# Altium PCB waku-ctl.PcbDoc (part 5 of 5)
Units mil, origin at the board's own origin, x right, y up, seen from the top; angles counter-clockwise.
Board outline 3530 x 2610 mil, 2 copper layers (Top Layer, Bottom Layer); 84 components, 84 nets, 358 pads, 106 vias.
Unrouted connection lines stored in the file: 42.
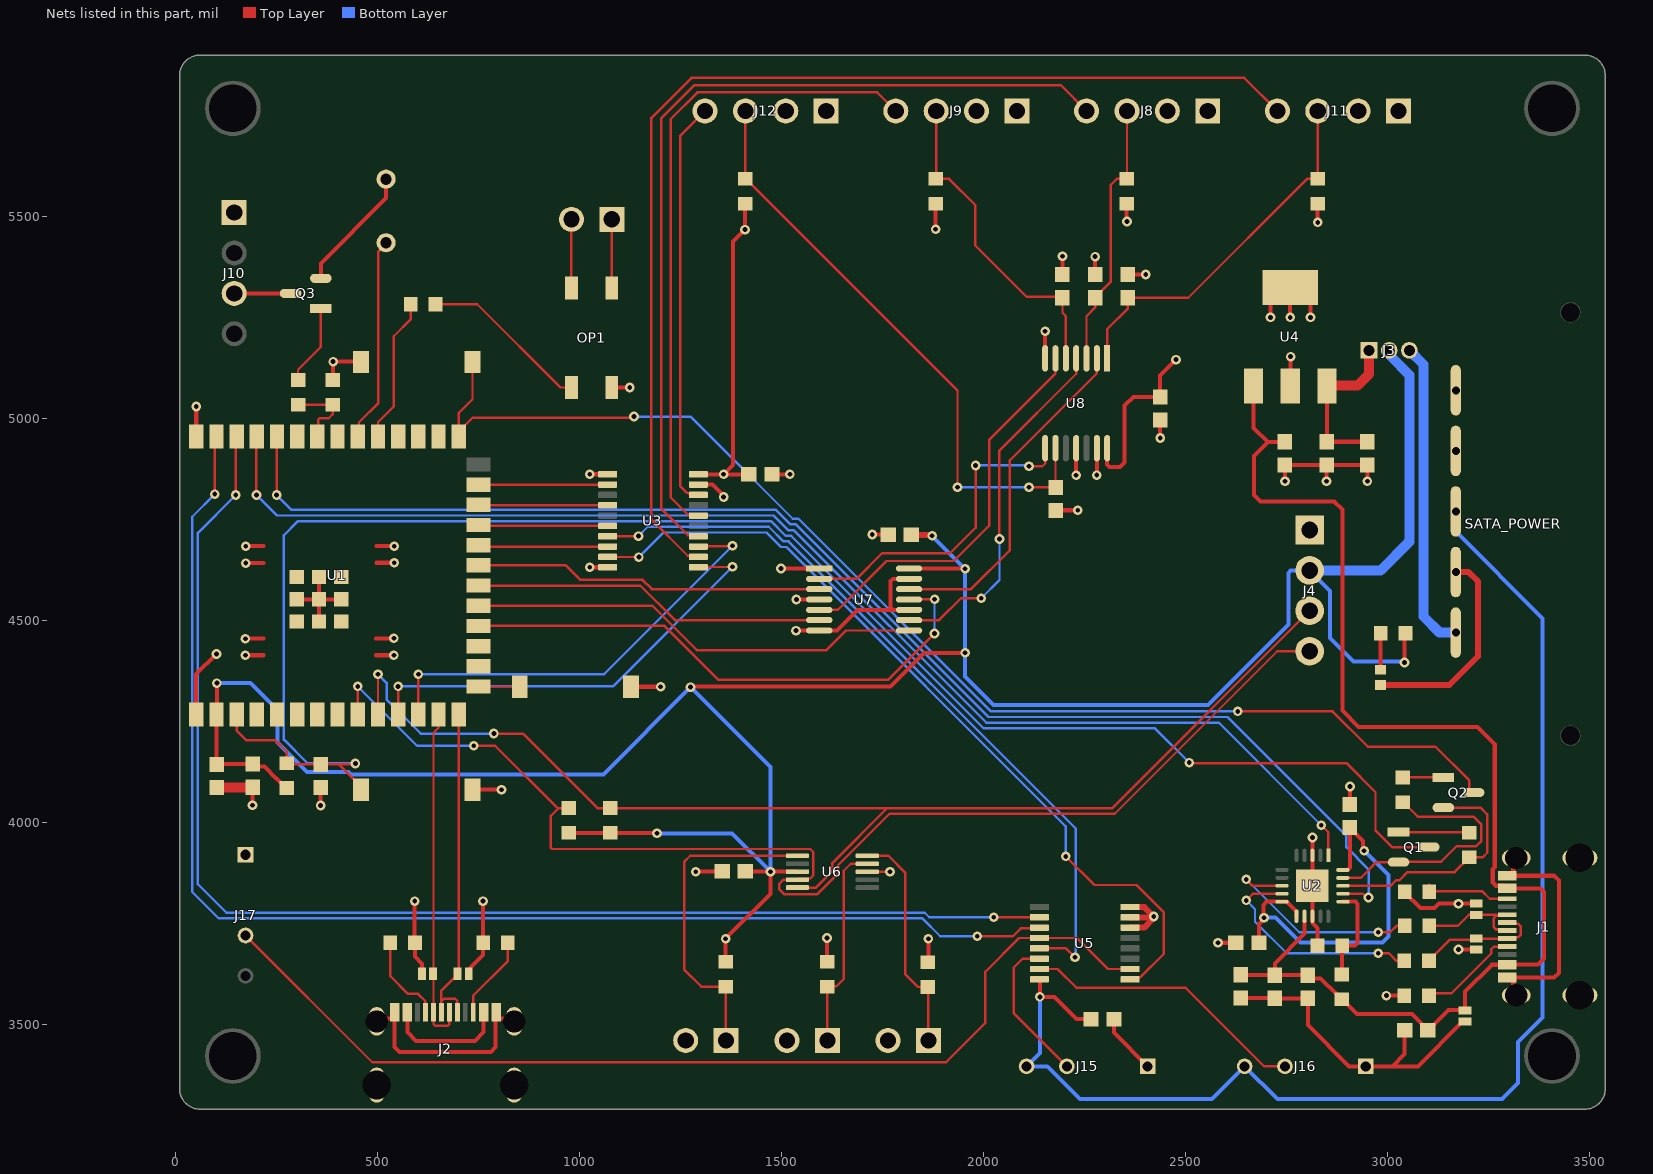
[diagram p2: the nets of this part, all layers, seen from the top]

## Via types
v1: diameter 24, hole 12, Top Layer to Bottom Layer, tented both sides, 106 vias

## Nets (pads, with @x,y where several pads share a name; then routed paths per layer and width w, separated by ;. In a path a pad name is that pad's centre, name@x,y a point inside that pad or via, vN(x,y) a via of type N, cw(c..) or ccw(c..) an arc to the next point about the centre after c; other vN are vias at no path point)
+3V3: C1.2 C2.1 C6.2 C19.2 J3.2 J4.2 R3.2 R4.2 R5.2 R7.2 R13.2 R15.1 R16.1 U1.2 U6.8 U7.14 | length 7026.9
  Top Layer w10: v1(102,4345) 102,4268.06 U1.2@100.95,4267.01 101.47,4266.48 101.47,4144.15 C19.2@102,4143.62 102.5,4144.12 190.5,4144.12 C2.1@191,4144.62 191,4143.72 196.46,4138.26 219.47,4138.26 248.55,4109.18 250.19,4109.18 273.95,4085.42 R13.2@275,4085.42 ; R15.1@973,3973.42 1075,3973.42 R16.1@1076,3974.42 1076.71,3973.71 1191.29,3973.71 v1(1192,3973) ; v1(1275,4335) 1277,4337 1770.63,4337 1853.63,4420 v1(1955,4420) ; R3.2@1362,3654.58 v1(1362,3712) 1473,3823 v1@1473,3877 ; C6.2@1410.62,3879 C6.2@1412.62,3877 ; C6.2@1412.62,3878 v1(1473,3878) v1@1473,3877 ; v1@1473.5,3877.5 v1@1473,3877 ; v1@1473.5,3878.5 U6.8@1538.89,3878.5 ; U6.8@1538.89,3877.5 U6.8@1539.39,3878 ; R4.2@1613,3656.58 v1(1613,3714) ; U7.14@1816.24,4628.77 1954.23,4628.77 v1(1955,4628) ; R5.2@1864,3654.58 v1(1864,3712) ; v1(3043,4396) 3043,4452.38 R7.2@3057.62,4467
  Top Layer w15: C1.2@1826.62,4713 1828.24,4711.38 1871.62,4711.38 v1(1873.24,4709.76)
  Top Layer w25: R4.2@1613,3654.58 R4.2@1615,3656.58 ; R5.2@1863,3653.58 R5.2@1864,3654.58
  Bottom Layer w10: v1(102,4345) 185,4345 252,4278 252,4198.37 325.37,4125 427.82,4125 433.82,4119 1059,4119 v1(1275,4335) 1473,4137 v1(1473,3878) 1378,3973 v1(1192,3973) ; v1(1873.24,4709.76) v1(1955,4628) 1955,4361.58 2025.58,4291 2556,4291 2755.21,4490.21 2755.21,4618.14 2761.06,4624 J4.2@2808,4624 2858.43,4573.57 2858.43,4456.57 2916.32,4398.68 3040.32,4398.68 v1(3043,4396)
  Bottom Layer w25: J4.2@2808,4624 2984,4624 3055,4695 3055,5107.95 3008.13,5154.82 3008.13,5165.87 J3.2@3005,5169
+3V3_EXT: J3.3 SATA_POWER.3V3 | length 770.1
  Bottom Layer w25: J3.3@3055,5169 3090,5134 3090,4510 3130,4470 SATA_POWER.3V3@3170,4470
+3V3_FTDI: C11.2 C13.2 U2.10 U2.11 U2.20 | length 975.2
  Top Layer w10: C13.2@2678.62,3702 2683,3706.38 2683,3748.21 2695,3760.21 v1(2695,3764) 2693.79,3765.21 2693.79,3796 2701.42,3803.63 U2.10@2739.59,3803.63 2750.89,3803.63 2775.63,3778.89 U2.11@2775.63,3767.59 ; U2.20@2890.41,3882.37 2901.72,3882.37 2908,3888.65 C11.2@2908,3987.38 2908,3986.47 2940.32,3954.15 2940.32,3932.68 v1(2943,3930)
  Bottom Layer w10: v1(2695,3764) 2723.94,3764 2784.94,3703 2988.36,3703 3003,3717.64 3003,3870 v1(2943,3930)
+3V3_REG: C12.2 C14.2 J3.1 U4.3 | length 414.4
  Top Layer w10: C14.2@2850,4942.62 C12.2@2942,4942.62 ; C14.2@2850,4943.53 C14.2@2857.55,4951.08 ; C14.2@2850.55,4951.08 U4.3@2850.55,5065.55 ; U4.3@2850.55,5080.95 U4.3@2850.55,5065.55 ; U4.3@2866.5,5081.5 U4.3@2850.55,5065.55
  Top Layer w25: U4.3@2866.5,5081.5 2926.5,5081.5 2955,5110 J3.1@2955,5169
+5: C3.1 C5.1 C7.2 J15.01 J16.01 R6.1 R18.1 R19.1 R20.1 SATA_POWER.5V U3.20 U5.16 U8.14 | length 4652.8
  Top Layer w10: U3.20@1294.2,4862.16 1294.28,4862.08 1356.92,4862.08 v1(1357,4862) ; R20.1@1411,5532.42 1410,5531.42 v1(1410,5468) 1380,5438 1380,4885 v1(1357,4862) ; C3.1@1419.38,4862 v1(1357,4862) ; v1(1882,5469) R18.1@1882,5532.42 ; U5.16@2138.8,3611.43 2140,3610.23 v1(2140,3568) 2176,3568 2231,3513 C5.1@2266.38,3513 ; U8.14@2306.77,4926.76 2306.77,4885.86 2312.63,4880 2339,4880 2350,4891 2350,5032 2371.62,5053.62 C7.2@2438,5053.62 2438,5107 v1(2477,5146) ; v1@2355,5488 R6.1@2355,5532.42 ; v1(2828,5486) R19.1@2828,5532.42
  Bottom Layer w10: v1(2140,3568) 2140,3429 J15.01@2107,3396 2158.37,3396 2239.37,3315 2566,3315 J16.01@2647,3396 2728,3315 3285,3315 3324.37,3354.37 3324.37,3456.48 3385,3517.11 3385,4505 3170,4720 SATA_POWER.5V@3170,4770
  other v1: 2356,5488
+5_VBUS1: C4.2 C8.2 C9.2 C10.2 C20.2 D3.2 J1.A4B9 J1.B4A9 R2.2 U2.12 U4.1 | length 3205.2
  Top Layer w10: C8.2@2638.57,3622.62 2721.57,3622.62 C10.2@2722,3622.19 ; U4.1@2669.45,5080.95 2669.45,4977.04 2704.77,4941.72 ; C10.2@2722,3621.62 2722,3651 2795.38,3724.38 U2.12@2795.38,3756.06 ; C10.2@2722.5,3622.12 2803.16,3622.12 2804.07,3621.22 2804.07,3621.15 2811.25,3613.96 2834.98,3613.96 2876.54,3572.4 2876.54,3571.83 2886.02,3562.35 2888.12,3562.35 2897.46,3553.02 2898.02,3553.02 2925.11,3525.94 3061.75,3525.94 3089.26,3498.42 3089.26,3495.46 3099.22,3485.5 3102.03,3485.5 3111.98,3495.46 3111.98,3495.89 3151.38,3535.28 3193.07,3535.28 3193.07,3581.5 3259.08,3647.51 J1.A4B9@3297.16,3647.51 ; C4.2@2747,4942.62 2746.09,4941.72 2704.77,4941.72 ; J1.A4B9@3297.16,3647.94 3373.51,3647.94 3388.28,3662.71 3388.28,3827.7 3379.5,3836.49 J1.B4A9@3297.16,3836.49 3290.47,3843.17 3269.14,3843.17 3261.52,3850.79 3261.52,3885.18 3266.5,3890.16 3266.5,4193.5 3223.57,4236.43 2929.57,4236.43 2889.01,4276.99 2889.01,4774.99 2869,4795 2686,4795 2670,4811 2670,4906.95 2704.77,4941.72
+12: J8.2 J9.2 J11.2 J12.2 SATA_POWER.12v
AX_AY: J15.02 U5.14 | length 371.8
  Top Layer w6: U5.14@2138.8,3662.61 2097.61,3662.61 2075,3640 2075,3528 J15.02@2207,3396
AY_BY: J17.02 U5.2 U5.12 | length 2553.9
  Top Layer w6: J17.02@173,3720 486.98,3406.02 1908.02,3406.02 2004.91,3502.91 2004.91,3629.91 2088.8,3713.8 U5.12@2138.8,3713.8 2231.91,3713.8 2308.69,3637.02 U5.2@2363.2,3637.02
BX_BY: J16.02 U5.15 | length 708
  Top Layer w6: U5.15@2138.8,3637.02 2183.98,3637.02 2230.44,3590.56 2501.07,3590.56 2695.63,3396 J16.02@2747,3396
CHIP_PU: C21.2 Q1.3 R13.1 S2.2 U1.3 | length 4417.6
  Top Layer w6: U1.3@150.95,4267.01 151,4266.95 151,4227.63 175.55,4203.09 246.91,4203.09 275,4175 R13.1@275,4146.58 277.96,4143.62 C21.2@359,4143.62 404.66,4143.62 ; v1(445,4146) 442.62,4143.62 404.66,4143.62 ; S2.2@459.41,4081 459.41,4088.87 404.66,4143.62 ; v1@2510,4147 2899,4147 2971.27,4074.73 2971.27,3979.75 3012.02,3939 Q1.3@3103,3939
  Bottom Layer w6: v1(445,4146) 327,4146 268,4205 268,4711 303,4746 1474.6,4746 1510.6,4710 1524,4710 2001,4233 2013.15,4233 2425,4233 v1(2510,4148)
CON1_USB_N: D4.2 J1.A7 J1.B7 R21.1 | length 312.5
  Top Layer w6.23: R21.1@3103.58,3658 3155.25,3709.67 3217.89,3709.67 D4.2@3221,3712.78 3221.31,3712.47 J1.B7@3297.16,3712.47 3299.82,3715.14 3324.4,3715.14 3330.91,3721.65 3330.91,3742.67 3324.4,3749.18 3299.82,3749.18 J1.A7@3297.16,3751.84
CON1_USB_P: D5.2 J1.A6 J1.B6 R22.1 | length 272.9
  Top Layer w6.23: R22.1@3104.58,3744 3174.92,3744 3202.14,3771.22 D5.2@3221,3771.22 3221.31,3771.53 3269.92,3771.53 ; J1.A6@3297.16,3732.16 3294.49,3734.82 3269.92,3734.82 3263.41,3741.33 3263.41,3762.35 3269.92,3768.86 3294.49,3768.86 J1.B6@3297.16,3771.53
CON2_USB_N: D1.2 J2.A7 J2.B7 U1.13 | length 843.7
  Top Layer w6.03: U1.13@650.95,4267.01 650.95,4234.47 638.55,4222.07 638.55,3604.22 J2.B7@638.55,3529.83 638.55,3500.45 642.82,3496.18 673.11,3496.18 677.92,3500.99 J2.A7@677.92,3529.83
CON2_USB_P: D2.2 J2.A6 J2.B6 U1.14 | length 826.3
  Top Layer w6.03: J2.A6@658.24,3529.83 658.24,3557.98 658.24,3583.73 691.43,3616.92 700.95,3626.44 U1.14@700.95,4267.01 ; 658.95,3557.98 664.45,3563.48 692.23,3563.48 697.61,3558.11 J2.B6@697.61,3529.83
DTR_FTDI: Q2.2 R11.2 U2.18 | length 602.3
  Top Layer w6: U2.18@2890.41,3843 3008.01,3843 3021.96,3856.96 3030.45,3856.96 3050.49,3877 3167.15,3877 R11.2@3203.58,3913.42 3236.42,3913.42 3248,3925 3248,4020 3231.4,4036.6 Q2.2@3139.15,4036.6
F0_5V_TACH: C18.1 J11.3 R19.2 U8.1 | length 931.5
  Top Layer w6: U8.1@2306.77,5149.24 2306.77,5221.77 2358,5273 C18.1@2358,5299.38 2507.38,5299.38 2801.58,5593.58 R19.2@2828,5593.58 2828.21,5593.79 J11.3@2828.21,5761.76
F0_IN_PWM: U1.22 U3.8 | length 321.1
  Top Layer w6: U1.22@750.16,4686.5 753.63,4683.02 U3.8@1069.8,4683.02
F0_IN_TACH: U1.18 U7.11 | length 1380
  Top Layer w6: U1.18@750.16,4486.5 1210.71,4486.5 1344.2,4353 1764,4353 v1(1879,4468) ; U7.11@1816.24,4552 1816.53,4552.3 1879.11,4552.3 v1(1879.41,4552.59)
  Bottom Layer w6: v1(1879,4468) 1879.2,4468.2 1879.2,4552.39 v1(1879.41,4552.59)
F0_OUT_PWM: J11.4 U3.12 | length 2774.1
  Top Layer w6: U3.12@1294.2,4657.43 1291.33,4660.31 1268.19,4660.31 1178,4750.5 1178,5744.71 1276.96,5843.67 2646.3,5843.67 J11.4@2728.21,5761.76
F0_OUT_TACH: U7.12 U8.2 | length 854.1
  Top Layer w6: U7.12@1816.24,4577.59 1969.59,4577.59 2065.38,4673.38 2065.38,4896.38 2281.18,5112.18 U8.2@2281.18,5149.24
F1_5V_TACH: C17.1 J8.3 R6.2 U8.3 | length 668.3
  Top Layer w6: U8.3@2255.59,5149.24 2255.59,5253.59 2277,5275 2277,5300.28 2316,5339.28 2316,5579 2330.58,5593.58 R6.2@2355,5593.58 2355.76,5594.34 J8.3@2355.76,5761.76
F1_IN_PWM: U1.23 U3.6 | length 320.6
  Top Layer w6: U1.23@750.16,4736.5 752.45,4734.2 U3.6@1069.8,4734.2
F1_IN_TACH: U1.19 U7.8 | length 1131.6
  Top Layer w6: U1.19@750.16,4536.5 1180.5,4536.5 1290.29,4426.71 1611.28,4426.71 1659.79,4475.23 U7.8@1816.24,4475.23
F1_OUT_PWM: J8.4 U3.14 | length 2200.8
  Top Layer w6: U3.14@1294.2,4708.61 1291.33,4711.49 1268.19,4711.49 1202,4777.68 1202,5743.26 1284.41,5825.67 2191.86,5825.67 J8.4@2255.76,5761.76
F1_OUT_TACH: U7.9 U8.4 | length 893
  Top Layer w6: U7.9@1816.24,4500.82 1890.71,4500.82 1944.9,4555 v1(1995,4555) ; v1(2040,4702) 2039.78,4702.22 2039.78,4920.78 2230,5111 U8.4@2230,5149.24
  Bottom Layer w6: v1(1995,4555) 2040,4600 v1(2040,4702)
F2_5V_TACH: C16.1 J9.3 R18.2 U8.5 | length 817.9
  Top Layer w6: J9.3@1883.32,5761.76 1883.32,5594.9 R18.2@1882,5593.58 1915.42,5593.58 1980,5529 1980,5429 2107.72,5301.28 2196,5301.28 2196,5262 2204.41,5253.59 U8.5@2204.41,5149.24
F2_IN_PWM: U1.24 U3.4 | length 320.1
  Top Layer w6: U1.24@750.16,4786.5 751.27,4785.39 U3.4@1069.8,4785.39
F2_IN_TACH: U1.20 U7.6 | length 879.1
  Top Layer w6: U1.20@750.16,4586.5 1150.5,4586.5 1236.18,4500.82 U7.6@1593.76,4500.82
F2_OUT_PWM: J9.4 U3.16 | length 1627.4
  Top Layer w6: U3.16@1294.2,4759.8 1291.33,4762.67 1268.19,4762.67 1226,4804.86 1226,5741.8 1291.87,5807.67 1737.42,5807.67 J9.4@1783.32,5761.76
F2_OUT_TACH: U7.5 U8.6 | length 989.4
  Top Layer w6: U7.5@1593.76,4526.41 1639.41,4526.41 1760.27,4647.27 1926.74,4647.27 2014.19,4734.72 2014.19,4947.19 2178.82,5111.82 U8.6@2178.82,5149.24
F3_5V_TACH: C15.1 J12.3 R20.2 U8.9 | length 1487.8
  Top Layer w6: J12.3@1410.88,5761.76 1410.88,5593.7 R20.2@1411,5593.58 1412.05,5593.58 1936,5069.63 v1@1936,4832 ; v1(2113,4830) 2178.62,4830 2178.82,4829.8 U8.9@2178.82,4926.76
  Bottom Layer w6: v1(1936,4830) v1(2113,4830)
F3_IN_PWM: U1.25 U3.2 | length 319.7
  Top Layer w6: U1.25@750.16,4836.5 750.23,4836.57 U3.2@1069.8,4836.57
F3_IN_TACH: U1.21 U7.3 | length 868
  Top Layer w6: U1.21@750.16,4636.5 966.5,4636.5 1002.5,4600.5 1156.3,4600.5 1179.21,4577.59 U7.3@1593.76,4577.59
F3_OUT_PWM: J12.4 U3.18 | length 1007.9
  Top Layer w6: U3.18@1294.2,4810.98 1291.33,4813.85 1271.57,4813.85 1269.72,4815.69 1266.35,4815.69 1250,4832.04 1250,5700.88 J12.4@1310.88,5761.76
F3_OUT_TACH: U7.2 U8.8 | length 807.6
  Top Layer w6: U7.2@1593.76,4603.18 1686.18,4603.18 1749.37,4666.37 1917.81,4666.37 1981,4729.56 v1(1981,4884) ; v1(2113,4882) 2146,4882 2153.23,4889.23 U8.8@2153.23,4926.76
  Bottom Layer w6: v1(1981,4884) 2111,4884 v1(2113,4882)
FDTI_USB_N: R21.2 U2.9 | length 566.6
  Top Layer w6.23: v1(2651,3807) 2667.32,3823.32 U2.9@2739.59,3823.32 ; v1(2978,3676) 3004.4,3676 3022.4,3658 R21.2@3042.42,3658
  Bottom Layer w5.2: v1(2651,3807) 2672.4,3785.6 2672.4,3754.64 2751.04,3676 v1(2978,3676)
FDTI_USB_P: R22.2 U2.8 | length 548.5
  Top Layer w6.23: v1(2651,3859) 2667,3843 U2.8@2739.59,3843 ; v1(2978,3728) 3007.4,3728 3023.4,3744 R22.2@3043.42,3744
  Bottom Layer w5.2: v1(2651,3859) 2782,3728 v1(2978,3728)
GND: C1.1 C2.2 C3.2 C4.1 C5.2 C6.1 C7.1 C8.1 C9.1 C10.1 C11.1 C12.1 C13.1 C14.1 C15.2 C16.2 C17.2 C18.2 C19.1 C20.1 C21.1 D1.1 D2.1 D3.1 D4.1 D5.1 D7.1 J1.A1B12 J1.B1A12 J1.S1 J1.S2 J1.S3 J1.S4 J2.A1B12 J2.B1A12 J2.S1 J2.S2 J2.S3 J2.S4 J4.1 J5.2 J6.2 J7.2 J8.1 J9.1 J10.1 J11.1 J12.1 J15.04 J16.04 J17.04 OP1.2 Q3.2 R8.1 R10.1 R14.1 R17.1 R23.1 R24.1 S1.1 S2.1 S3.1 SATA_POWER.GND-1 SATA_POWER.GND-2 SPK1.2 U1.1 U1.40 U1.41 U1.42 U1.43 U1.44 U1.45 U1.46 U1.47 U1.48 U1.49 U2.3 U2.13 U2.21 U3.1 U3.10 U3.19 U4.2 U4.4 U5.6 U5.7 U5.8 U6.3 U7.1 U7.4 U7.7 U7.10 U7.13 U8.7 U8.11 U8.13 | length 7298.1
  Top Layer w6: U6.3@1712.61,3878 v1(1769,3878)
  Top Layer w10: U1.1@50.95,4267.01 50.95,4366.95 v1(101,4417) ; U1.40@50.95,4955.98 51,4956.04 v1(51,5030) ; v1(172.58,4414) 217,4414 ; v1(172.58,4455) 217,4455 ; v1(173.58,4642) 218,4642 ; v1(173.58,4684) 218,4684 ; v1(190.5,4042.46) C2.2@190.5,4086.88 ; U1.48@299.76,4552.44 U1.41@354.88,4552.44 ; U1.42@354.88,4497.32 U1.41@354.88,4552.44 ; U1.43@354.88,4607.56 U1.41@354.88,4552.44 ; v1(359,4041.96) C21.1@359,4086.38 ; Q3.2@359.42,5347.4 359.42,5384.42 521,5546 SPK1.2@521,5593 ; R10.1@389,5095.58 390,5096.58 v1(390,5141) S1.1@462,5141 ; U1.45@410,4552.44 U1.41@354.88,4552.44 ; 496,4414 v1(540.42,4414) ; 496,4456 v1(540.42,4456) ; 497,4643 v1(541.42,4643) ; 497,4684 v1(541.42,4684) ; J2.S1@498,3507.19 505.5,3514.69 537.78,3514.69 J2.A1B12@542.09,3519 ; J2.A1B12@542.09,3529.83 542.09,3443.72 553.81,3432 780.66,3432 792.38,3443.72 J2.B1A12@792.38,3528.14 ; R17.1@592,3704.64 v1(592,3805) ; R17.1@595,3704.64 R17.1@592.58,3702.22 592.58,3667.42 610,3650 D1.1@610,3625.22 ; D2.1@725.78,3635.78 761.42,3671.42 R14.1@761.42,3702.22 ; S2.1@735,4081 v1(807,4081) ; R14.1@761,3703.64 v1(761,3805) ; J2.B1A12@792.38,3520.69 798.37,3514.69 830.66,3514.69 J2.S2@838.16,3507.19 ; v1(1025.38,4631.84) U3.10@1069.8,4631.84 ; v1(1025.38,4862.16) U3.1@1069.8,4862.16 ; OP1.2@1080,5076.97 v1(1124.42,5076.97) ; S3.1@1129,4336 v1(1201,4336) ; v1@1288.5,3878.5 C6.1@1352.88,3878.5 ; U3.19@1294.2,4836.57 1329.6,4836.57 1357,4809.17 v1(1357,4806) ; C3.2@1476.62,4862 v1(1521.04,4862) ; v1(1499,4629) 1499.11,4628.89 1593.65,4628.89 U7.1@1593.76,4628.77 ; v1(1536,4475) 1536.11,4475.11 1593.65,4475.11 U7.7@1593.76,4475.23 1637.16,4475.23 1688.35,4526.41 1776.59,4526.41 ; v1(1537,4552) U7.4@1597.76,4552 ; v1(1724.96,4713) C1.1@1769.38,4713 ; U7.10@1816.24,4526.41 1776.59,4526.41 ; U7.13@1816.24,4603.18 1776.51,4603.18 1770.65,4597.32 1770.65,4532.35 1776.59,4526.41 ; U8.7@2153,5172 v1(2153,5216.42) ; C15.2@2179,4772.38 2179.62,4773 v1(2234,4773) ; C16.2@2196,5357.62 v1(2196,5402.04) ; v1(2229.82,4859.61) 2229.91,4859.7 2229.91,4926.67 U8.11@2230,4926.76 ; C17.2@2277,5356.62 v1(2277,5401.04) ; v1@2281,4855 2281.09,4855.09 2281.09,4926.67 U8.13@2281.18,4926.76 ; C5.2@2323.62,3513 2323.62,3479.38 J15.04@2407,3396 ; C18.2@2358,5356.62 v1(2402.42,5356.62) ; v1(2438,4951.96) C7.1@2438,4996.38 ; v1(2580.96,3702) C13.1@2625.38,3702 ; C8.1@2638,3565.38 2638.5,3564.88 2721.5,3564.88 C10.1@2722,3564.38 C9.1@2804,3564.38 2804,3498 2906,3396 J16.04@2947,3396 3013,3396 ; v1(2711,5250.58) U4.4@2711,5295 ; v1(2747,4845) C4.1@2747,4885.38 C14.1@2843,4885.38 ; v1(2760,5250.58) U4.4@2760,5295 ; U4.2@2761,5119 v1(2761,5153.42) ; v1(2810,5250.58) U4.4@2810,5295 ; v1(2815,3962.84) U2.3@2815,3918.41 U2.21@2815,3843 U2.13@2815,3767.59 2815,3750.38 2827.42,3737.96 R8.1@2827.42,3695 ; v1(2850,4845) C14.1@2850,4885.38 C12.1@2942,4885.38 ; C11.1@2908,4044.62 v1(2908,4089.04) ; v1(2951,4845) C12.1@2951,4885.38 ; v1(2998,3571) R24.1@3042.42,3571 ; C20.1@3043.38,3485 3043.38,3426.38 3013,3396 ; R23.1@3043.42,3828 3043.42,3826.95 3082.37,3788 3117.82,3788 3128.6,3798.78 v1(3176.58,3798.78) D5.1@3221,3798.78 ; v1(3176.58,3685.22) D4.1@3221,3685.22 ; D3.1@3193,3507.22 3187.09,3507.22 3075.87,3396 3013,3396 ; J1.B1A12@3306,3867.98 3413.28,3867.98 3425,3856.27 3425,3627.73 3413.28,3616.02 J1.A1B12@3297.16,3616.02 3307.98,3616.02 3312.3,3611.7 3312.3,3579.42 J1.S1@3319.8,3571.92 ; J1.B1A12@3307.98,3867.98 3312.3,3872.3 3312.3,3904.58 J1.S2@3319.8,3912.08
  Top Layer w15: v1(1288,3878) v1@1288.5,3878.5 ; C6.1@1352.88,3878.5 C6.1@1353.38,3879 ; v1(1769,3878) v1@1770,3877 ; U5.6@2363.2,3739.39 2363.42,3739.6 2398.6,3739.6 2420.28,3761.28 2420.28,3765.28 v1(2422,3767) ; U5.7@2363.2,3764.98 2417.54,3764.98 2419.56,3767 v1(2422,3767) ; U5.8@2363.2,3790.57 2363.42,3790.35 2398.65,3790.35 v1(2422,3767) ; D7.1@2984,4340.3 3154.3,4340.3 3225,4411 3225,4597 3202,4620 SATA_POWER.GND-2@3170,4620
  Top Layer w20: C19.1@102,4086.38 C19.1@102.5,4086.88 ; C2.2@190.5,4086.88 C2.2@191,4087.38
  Top Layer w25: C19.1@102.5,4086.88 C2.2@190.5,4086.88
  other v1: 2281,4860
GPIO0: Q2.3 S1.2 U1.27 | length 3126
  Top Layer w6: U1.27@700.95,4955.98 U1.27@700.95,4967.8 ; S1.2@735,5140 735,5048 700.95,5013.95 U1.27@700.95,4967.8 ; v1(1135,5005) 1132.56,5002.56 735.71,5002.56 U1.27@700.95,4967.8 ; v1(2630,4275) 2864.84,4275 2952.37,4187.46 3119.45,4187.46 3203.55,4103.37 3203.55,4079.79 3209.33,4074 Q2.3@3214,4074
  Bottom Layer w6: v1(1135,5005) 1275,5005 1528,4752 1541.95,4752 2018.95,4275 v1(2630,4275)
GPIO4: U1.4
GPIO5: U1.5
GPIO6: U1.6
GPIO7: U1.7
GPIO9: U1.17
GPIO15: U1.8
GPIO35: U1.28
GPIO36: U1.29
GPIO37: U1.30
GPIO40: U1.33
GPIO42: U1.35
GPIO46: U1.16
MUX_A: U1.39 U5.11 | length 3305
  Top Layer w6: v1(97,4813) 97,4952.04 U1.39@100.95,4955.98 ; v1(1985,3718) 2073.2,3718 2093.2,3738 2108,3738 2109.67,3738 ; 2109.69,3738.02 2137.43,3738.02 U5.11@2138.8,3739.39
  Bottom Layer w6: v1(97,4813) 41,4757 41,3828 106.78,3762.22 1849.13,3762.22 1893.36,3718 v1(1985,3718)
MUX_B: U1.38 U5.10 | length 3266.5
  Top Layer w6: v1(148.81,4810.81) 148.81,4953.84 U1.38@150.95,4955.98 ; v1(2026,3765) U5.10@2138.8,3764.98
  Bottom Layer w6: v1(148.81,4810.81) 55,4717 55,3847 125.78,3776.22 1854.93,3776.22 1866.15,3765 v1(2026,3765)
NetD7_2: D7.2 R7.1 | length 90.5
  Top Layer w10: D7.2@2984,4377.7 2984,4467.58 R7.1@2984.42,4468
NetJ1_A5: J1.A5 R24.2 | length 248.8
  Top Layer w6: R24.2@3102.58,3576 3103.21,3576.63 3158.63,3576.63 3258.13,3676.13 3258.13,3686.15 3263.99,3692.01 3296.38,3692.01 J1.A5@3297.16,3692.79
NetJ1_B5: J1.B5 R23.2 | length 206.5
  Top Layer w6: 3104.58,3846 3104.58,3844.95 R23.2@3116.48,3833.04 ; R23.2@3116.48,3830 3235,3830 3254.1,3810.9 J1.B5@3297.16,3810.9
NetJ2_A4B9: J2.A4B9 J2.B4A9 | length 305.5
  Top Layer w10: J2.A4B9@573.59,3529.83 573.59,3480.41 595,3459 741,3459 762.57,3480.57 J2.B4A9@762.57,3529.83
NetJ2_A5: J2.A5 R17.2 | length 223.2
  Top Layer w6: R17.2@531.42,3702.22 531.42,3619.58 575.53,3575.47 600.46,3575.47 618.09,3557.85 618.09,3530.61 J2.A5@618.87,3529.83
NetJ2_B5: J2.B5 R14.2 | length 207.8
  Top Layer w6: J2.B5@736.98,3529.83 736.98,3571.44 822.58,3657.04 R14.2@822.58,3702.22
NetJ5_1: J5.1 R3.1 U6.6 | length 806.5
  Top Layer w6: R3.1@1362,3593.42 1301.58,3593.42 1259,3636 1259,3902 1274.37,3917.37 U6.6@1539.39,3917.37 ; R3.1@1362.5,3592.92 1362.5,3460.5 J5.1@1363,3460
NetJ6_1: J6.1 R4.1 U6.4 | length 516.5
  Top Layer w6: J6.1@1614,3460 1614,3592.42 R4.1@1613,3593.42 1614.02,3594.44 1636.44,3594.44 1654.31,3612.31 1654.31,3880.31 1671.69,3897.69 U6.4@1712.61,3897.69
NetJ7_1: J7.1 R5.1 U6.5 | length 565.1
  Top Layer w6: U6.5@1712.61,3917.37 1764.99,3917.37 1806.52,3875.84 1806.52,3624.49 1838.58,3592.42 R5.1@1863,3592.42 1864,3591.42 J7.1@1864,3460
NetJ10_3: J10.3 Q3.3 | length 139.6
  Top Layer w10: J10.3@144.96,5310 Q3.3@284.58,5310
NetJ13_1: J13.1 OP1.3 | length 170.4
  Top Layer w6: OP1.3@1080,5323.03 J13.1@1080,5493.43
NetJ13_2: J13.2 OP1.4 | length 170.4
  Top Layer w6: OP1.4@980,5323.03 J13.2@980,5493.43
NetOP1_1: OP1.1 R1.1 | length 421.8
  Top Layer w6: R1.1@643.58,5283 747,5283 953.03,5076.97 OP1.1@980,5076.97
NetQ1_1: Q1.1 R11.1 | length 176.2
  Top Layer w6: Q1.1@3028.15,3976.4 3029.06,3975.49 3202.66,3975.49 R11.1@3203.58,3974.58
NetQ2_1: Q2.1 R12.1 | length 100.2
  Top Layer w6: R12.1@3039,4111.18 3039.23,4111.4 Q2.1@3139.15,4111.4
NetQ3_1: Q3.1 R9.2 | length 210.4
  Top Layer w6: R9.2@303,5085.58 303,5121 359.42,5177.42 Q3.1@359.42,5272.6
P_OC: R1.2 U1.31 | length 360.8
  Top Layer w6: U1.31@500.95,4955.98 501,4956.03 501,4991 540,5030 540,5204 582.42,5246.42 R1.2@582.42,5283
P_RST: S3.2 U1.15 | length 102.3
  Top Layer w6: U1.15@750.16,4336.5 S3.2@851.71,4336.5
  Top Layer w10: S3.2@851.71,4336.5 S3.2@852.2,4336
P_SPKR: SPK1.1 U1.32 | length 508.6
  Top Layer w6: U1.32@450.95,4955.98 454.1,4959.14 454.1,4991 502,5038.9 502,5413.36 521,5432.36 SPK1.1@521,5435.52
P_TACH_SIG: R9.1 R10.2 U1.34 | length 193.4
  Top Layer w6: R9.1@303,5034.42 R10.2@389,5034.42 389,5011 379,5001 356.51,5001 353,4997.49 353,4958.04 U1.34@350.95,4955.98
RGB_IN_1: U1.12 U3.13 | length 1095.3
  Top Layer w6: U1.12@600.95,4267.01 601,4267.06 v1(601,4367) ; U3.13@1294.2,4683.02 1295.19,4684.01 1378.01,4684.01 v1(1379,4685)
  Bottom Layer w6: v1(601,4367) 1061,4367 v1(1379,4685)
RGB_IN_2: U1.11 U3.11 | length 1105.9
  Top Layer w6: U1.11@550.95,4267.01 551,4267.06 v1(551,4337) ; U3.11@1294.2,4631.84 1294.78,4632.42 1378.42,4632.42 v1(1379,4633)
  Bottom Layer w6: v1(551,4337) 1083,4337 v1(1379,4633)
RGB_OUT_1: U3.9 U5.1 | length 2048.3
  Top Layer w6: U3.9@1069.8,4657.43 1070.01,4657.22 1146.78,4657.22 v1(1147,4657) ; v1(2204,3916) 2275.04,3844.96 2379.4,3844.96 2447,3777.36 2447,3674.92 2388.39,3616.31 2368.08,3616.31 U5.1@2363.2,3611.43
  Bottom Layer w6: v1(1147,4657) 1208,4718 1463.01,4718 1499.01,4682 1512.2,4682 2204,3990.2 v1(2204,3916)
RGB_OUT_2: U3.7 U5.13 | length 1895.5
  Top Layer w6: U3.7@1069.8,4708.61 1069.99,4708.81 1145.81,4708.81 v1(1146,4709) ; U5.13@2138.8,3688.2 2204.8,3688.2 v1(2227,3666)
  Bottom Layer w6: v1(1146,4709) 1169,4732 1468.8,4732 1504.8,4696 1518,4696 2229,3985 2229,3668 v1(2227,3666)
RTS_FTDI: Q1.2 R12.2 U2.19 | length 638.4
  Top Layer w6: U2.19@2890.41,3862.69 2934.64,3862.69 2973.55,3901.6 Q1.2@3028.15,3901.6 3029.55,3903 3134,3903 3172.33,3941.33 3220.74,3941.33 3232.53,3953.12 3232.53,3996.04 3214.24,4014.34 3075.73,4014.34 3040.05,4050.02 R12.2@3039,4050.02
RXD_FTDI: U1.37 U2.1 | length 3203
  Top Layer w6: v1(200,4811) 200,4955.04 U1.37@200.95,4955.98 ; v1(2837,3993) 2854.37,3975.63 U2.1@2854.37,3918.41
  Bottom Layer w6: v1(200,4811) 251,4760 1480.4,4760 1516.4,4724 1530.36,4724 2007.36,4247 2583,4247 v1(2837,3993)
SCL: J4.3 R16.2 U1.10 U6.10 | length 3086.9
  Top Layer w6: U1.10@500.95,4267.01 501,4267.06 v1(501,4367) ; v1(788,4220) 860,4220 1044.42,4035.58 R16.2@1076,4035.58 1762.16,4035.58 ; U6.10@1539.39,3838.63 1585.63,3838.63 1626.31,3879.31 1626.31,3899.72 1762.16,4035.58 ; J4.3@2808,4524 2319.58,4035.58 1762.16,4035.58
  Bottom Layer w6: v1(501,4367) 522.54,4345.46 522.54,4304.46 607,4220 v1(788,4220)
SDA: J4.4 R15.2 U1.9 U6.9 | length 3219
  Top Layer w6: U1.9@450.95,4267.01 451,4267.06 v1(451,4337) ; v1(738,4190) 791,4190 946.42,4034.58 ; R15.2@973,4034.58 947.58,4034.58 929.03,4016.03 929.03,3937.79 932.54,3934.28 1571.34,3934.28 1578.93,3926.69 1578.93,3868.68 1571.34,3861.09 1542.16,3861.09 1539.43,3858.36 1505.36,3858.36 1495,3848 1495,3834.15 1507.43,3821.72 1588.52,3821.72 1640.31,3873.51 1640.31,3893.93 1767.96,4021.58 2325.38,4021.58 2727.8,4424 J4.4@2808,4424
  Bottom Layer w6: v1(451,4337) 598,4190 v1(738,4190)
TXD_FTDI: U1.36 U2.17 | length 3386.8
  Top Layer w6: v1(250,4811) 250,4955.04 U1.36@250.95,4955.98 ; U2.17@2890.41,3823.32 2939.81,3823.32 2949.13,3814 v1(2954,3814)
  Bottom Layer w6: v1(250,4811) 287,4774 1486.2,4774 1522.2,4738 1536.15,4738 2013.15,4261 2604.36,4261 2898.96,3966.4 2898.96,3938.69 2954,3883.64 v1(2954,3814)
VBUS_SENSE: R2.1 R8.2 U2.16 | length 248.2
  Top Layer w10: R2.1@2887,3623.58 2887.79,3624.37 2887.79,3694.21 R8.2@2888.58,3695 2920,3695 2927,3702 2927,3797.77 2921.14,3803.63 U2.16@2890.41,3803.63
pads on no net: J1.A8 J1.B8 J2.A8 J2.B8 J10.2 J10.4 J17.01 SATA_POWER.DH1 U1.26 U2.2 U2.4 U2.5 U2.6 U2.7 U2.14 U2.15 U3.3 U3.5 U3.15 U3.17 U5.3 U5.4 U5.5 U5.9 U6.1 U6.2 U6.7 U8.10 U8.12

## Polygon pours and split planes (outlines as drawn)
GND on Top Layer "NONET_L-01_P-001" (solid, pour order 42): 52.5,3290 cw(c52.5,3335) 7.5,3335 7.5,5850 cw(c57.5,5850) 57.5,5900 3487.5,5900 cw(c3487.5,5850) 3537.5,5850 3537.5,3340 cw(c3487.5,3340) 3487.5,3290
GND on Top Layer "NONET_L-01_P-001" (solid, pour order 1): 210,4700 210,4400 510,4400 510,4700
GND on Bottom Layer "NONET_L-01_P-001" (solid, pour order 41): 57.5,3290 cw(c57.5,3335) 12.5,3335 12.5,5850 cw(c62.5,5850) 62.5,5900 3492.5,5900 cw(c3492.5,5850) 3542.5,5850 3542.5,3340 cw(c3492.5,3340) 3492.5,3290
+3V3 on Bottom Layer "NONET_L-01_P-001" (solid, pour order 40): 1335,3745 1890,3745 1890,3680 1335,3680
+5 on Bottom Layer "NONET_L-01_P-001" (solid, pour order 39): 3215,4840 3215,4695 3120,4695 3120,5455 2855,5455 2855,5500 3140,5500 3140,4840
+12 on Bottom Layer "NONET_L-01_P-001" (solid, pour order 37): 1245,5825 3215,5825 3215,5000 3150,5000 3150,5710 1245,5710
+5 on Bottom Layer "NONET_L-01_P-001" (solid, pour order 38): 1310,5500 2880,5500 2880,5480 2855,5455 2520,5455 2520,5125 2430,5125 2430,5455 1315,5455 1310,5460

## Silkscreen, mask and mechanical layers (free items; w line width, h text height)
Top Solder:
  circle w64.96: c141.73,5768.27 r32.48
  circle w64.96: c3408.27,5768.27 r32.48
  circle w64.96: c141.73,3421.73 r32.48
  circle w64.96: c3408.26,3421.73 r32.48
Bottom Solder:
  circle w64.96: c141.73,5768.27 r32.48
  circle w64.96: c3408.27,5768.27 r32.48
  circle w64.96: c141.73,3421.73 r32.48
  circle w64.96: c3408.26,3421.73 r32.48

## Text inside footprints (layer, text, board x,y; h text height)
U1: Top 3D Body "ANTENNA" at -115.98,4434.33 h50 r90